# Altium PCB ControlBoard.PcbDoc
Units mil, origin at the board's own origin, x right, y up, seen from the top; angles counter-clockwise.
Board outline 6000 x 4000 mil, 2 copper layers (Top Layer, Bottom Layer); 74 components, 96 nets, 363 pads, 6 vias.
Unrouted connection lines stored in the file: 181.
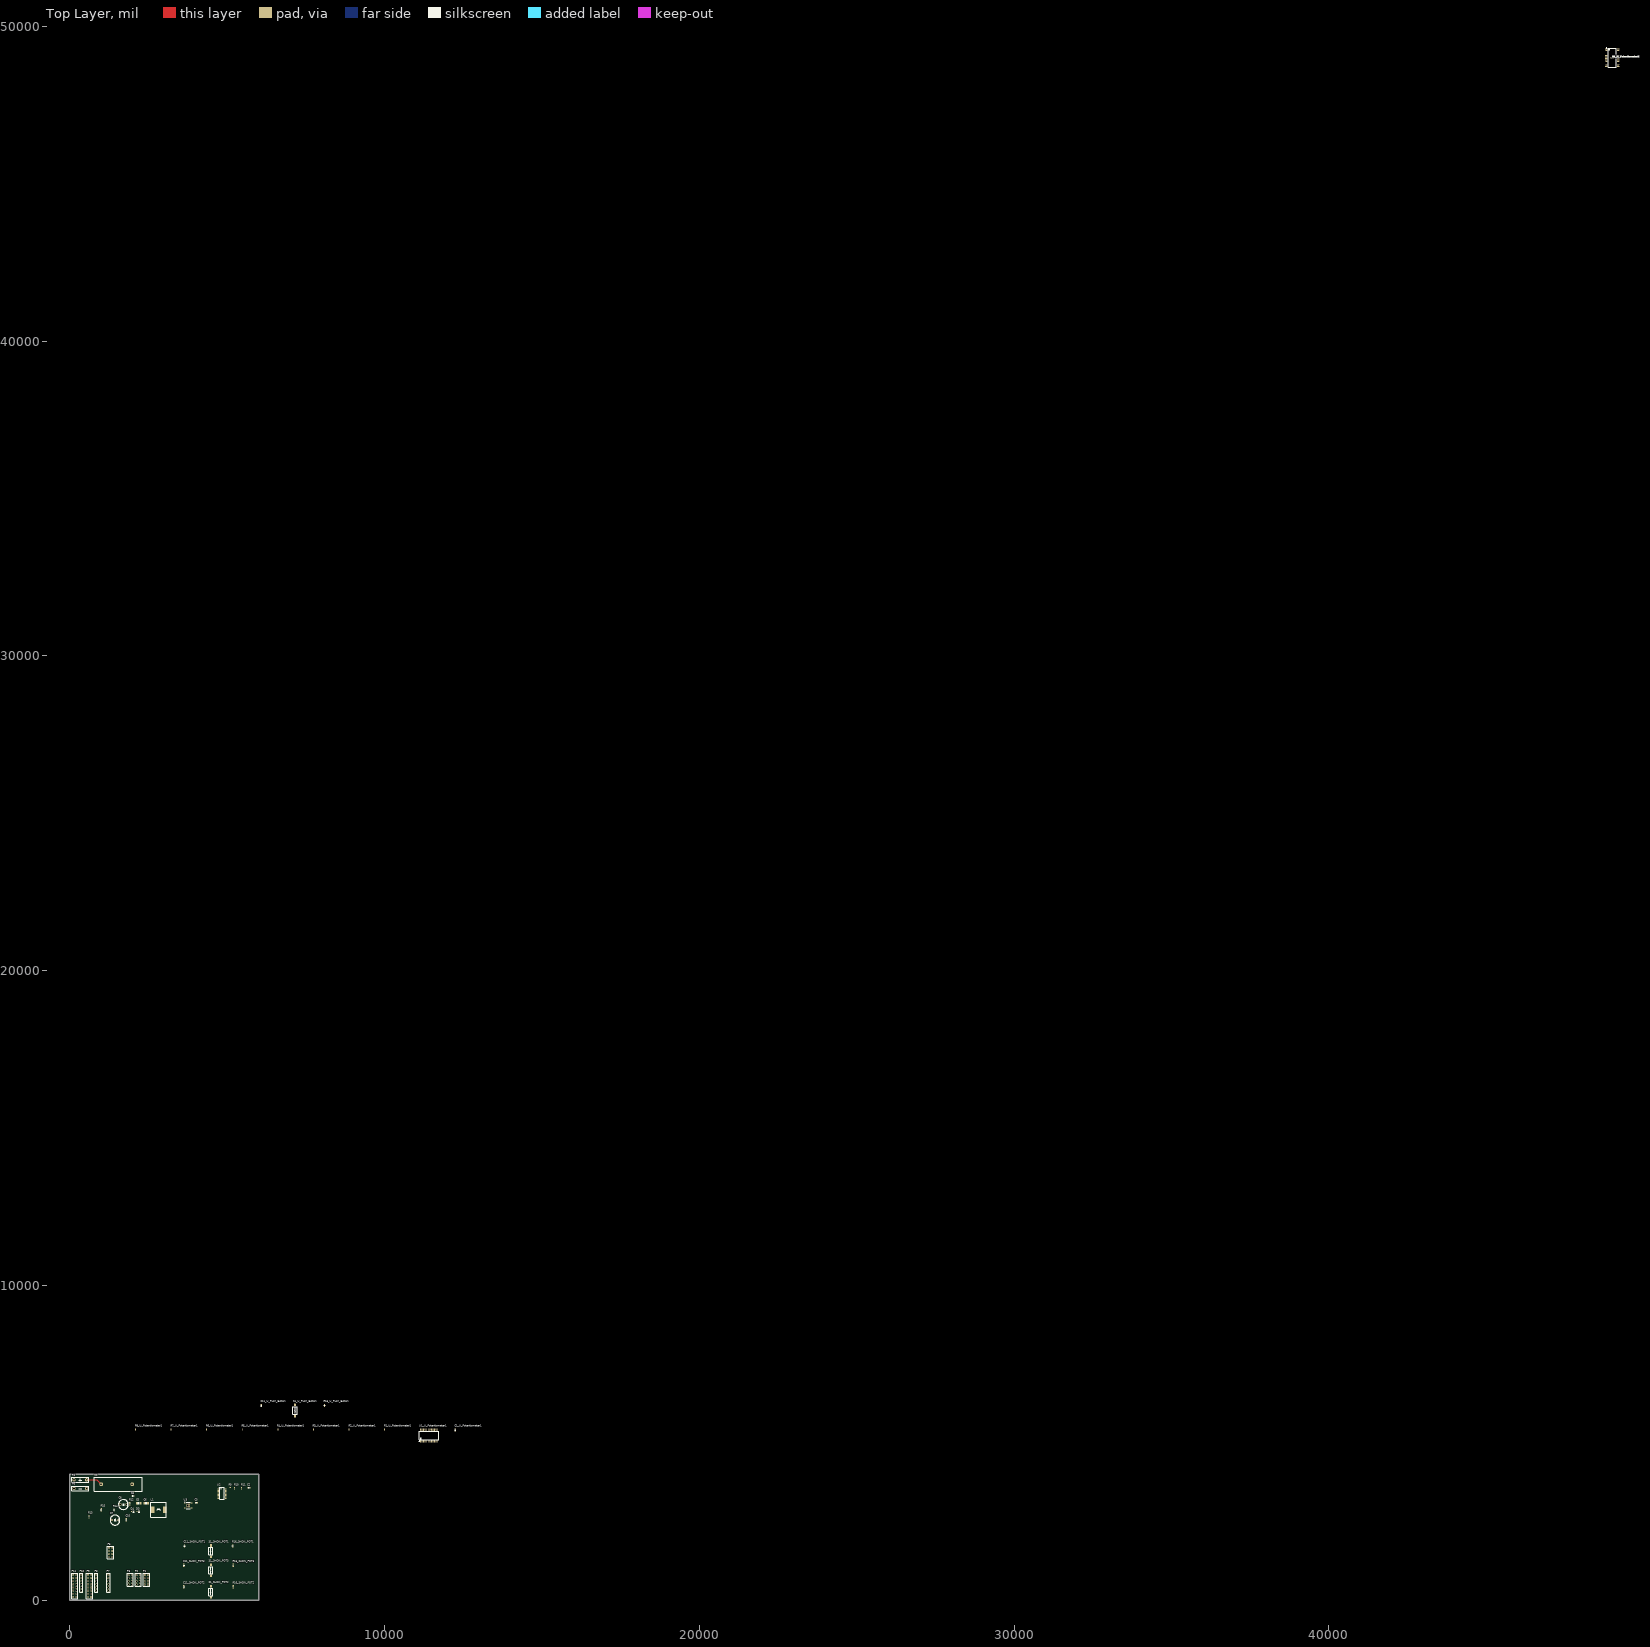
[diagram p0: Top Layer view]
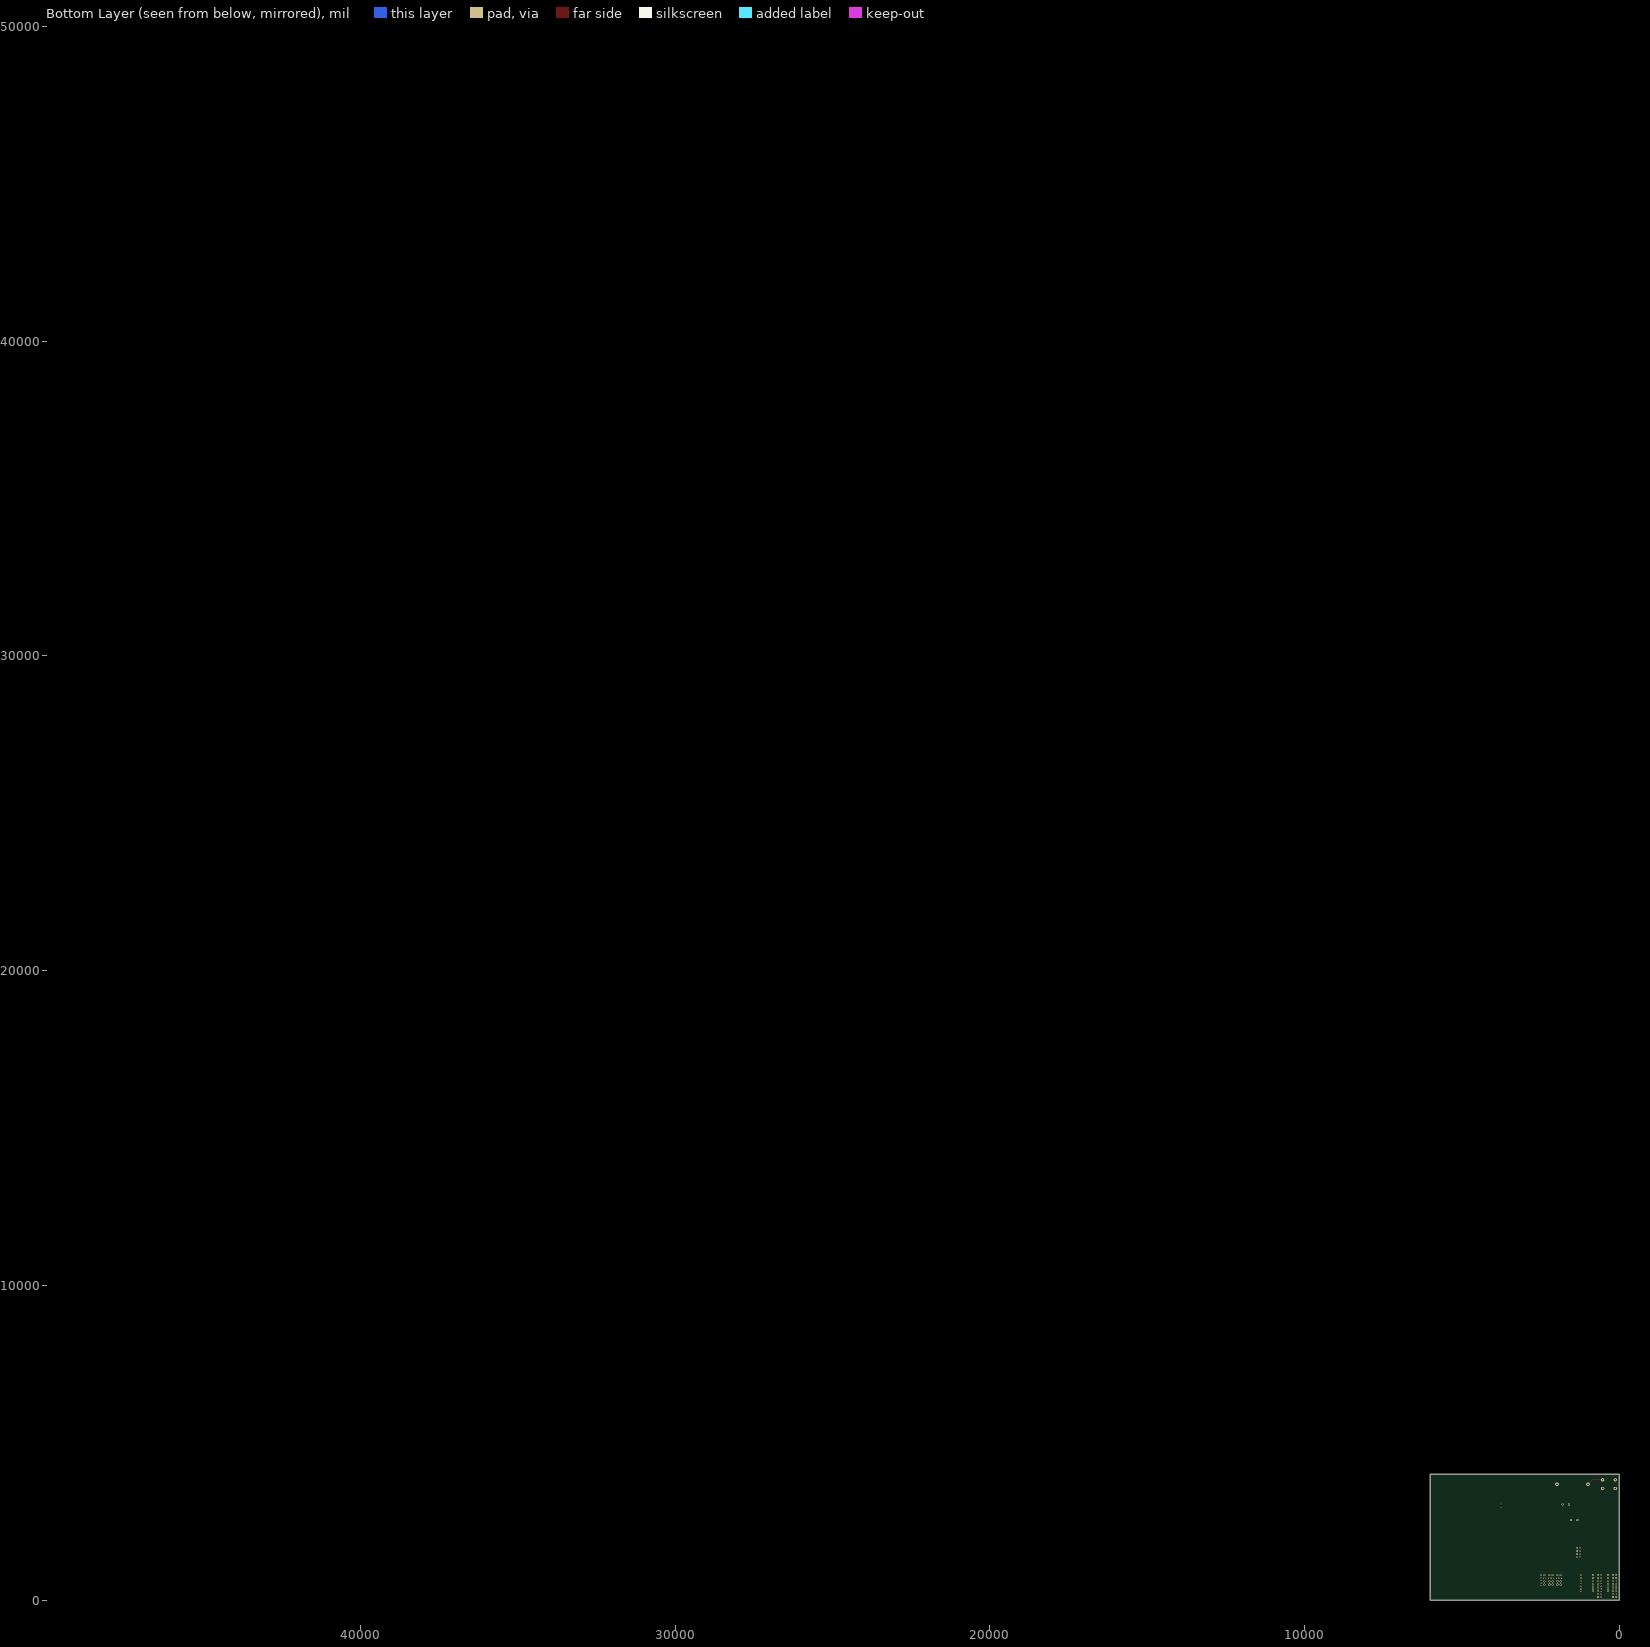
[diagram p1: Bottom Layer view, seen from below]

## Layer stack, top to bottom
Top Solder: solder mask 0.4, Solder Resist, Dk 3.5
Top Layer: signal copper 1.4
Dielectric 1: dielectric 12.6, FR-4, Dk 4.8
Bottom Layer: signal copper 1.4
Bottom Solder: solder mask 0.4, Solder Resist, Dk 3.5

## Board outline
0,0 6000,0 6000,4000 0,4000

## Design rules (kind name [scope] priority, off if disabled: settings)
Clearance [All] p1: gap=10
PolygonConnect [All] p1: connectstyle=Relief reliefconductorwidth=10 reliefentries=4 polygonreliefangle="90 Angle" airgapwidth=10
RoomDefinition U_Push_Button [InComponentClass('U_Push_Button')] p1: confinementstyle=ConfineIn formatcopy=TRUE lockcomponents=FALSE outline 6045,5795 9060,5795 9060,6365 6045,6365
RoomDefinition U_Potentiometer3 [InComponentClass('U_Potentiometer3')] p2: confinementstyle=ConfineIn formatcopy=TRUE lockcomponents=FALSE outline 48760,48675 50095,48675 50095,49325 48760,49325
RoomDefinition U_Potentiometer2 [InComponentClass('U_Potentiometer2')] p3: confinementstyle=ConfineIn formatcopy=TRUE lockcomponents=FALSE outline 48760,48675 50095,48675 50095,49325 48760,49325
RoomDefinition U_Potentiometer1 [InComponentClass('U_Potentiometer1')] p4: confinementstyle=ConfineIn formatcopy=TRUE lockcomponents=FALSE outline 2055,4989.69 13290,4989.69 13290,5579.69 2055,5579.69
RoomDefinition U_LED_Controller [InComponentClass('U_LED_Controller')] p5: confinementstyle=ConfineIn formatcopy=TRUE lockcomponents=FALSE outline 4670,3179.69 5760,3179.69 5760,3704.69 4670,3704.69
RoomDefinition U_DC-DC [InComponentClass('U_DC-DC')] p6: confinementstyle=ConfineIn formatcopy=TRUE lockcomponents=FALSE outline 8.46,2355 4378.46,2355 4378.46,3995 8.46,3995
RoomDefinition SHDN_POT3 [InComponentClass('SHDN_POT3')] p7: confinementstyle=ConfineIn formatcopy=TRUE lockcomponents=FALSE outline 3585,718.46 5940,718.46 5940,1288.46 3585,1288.46
RoomDefinition SHDN_POT2 [InComponentClass('SHDN_POT2')] p8: confinementstyle=ConfineIn formatcopy=TRUE lockcomponents=FALSE outline 3585,33.46 5940,33.46 5940,603.46 3585,603.46
RoomDefinition SHDN_POT1 [InComponentClass('SHDN_POT1')] p9: confinementstyle=ConfineIn formatcopy=TRUE lockcomponents=FALSE outline 3605,1325 5900,1325 5900,1895 3605,1895
RoomDefinition ControlBoard [InComponentClass('ControlBoard')] p10: confinementstyle=ConfineIn formatcopy=TRUE lockcomponents=FALSE outline 40,40 2540,40 2540,960 40,960
RoutingVias [All] p1: holewidth=28 width=50 viastyle="Through Hole" minholewidth=28 minwidth=50 maxholewidth=28 maxwidth=50
SolderMaskExpansion [All] p1: expansion=4
Width [All] p1: maxlimit=10 minlimit=8 preferedwidth=10 minimp=50.000000 maximp=50.000000 favimp=50.000000
30 further rules are at their usual default settings.

## Classes and differential pairs
channel class Push_Button: SHDN_POT1 SHDN_POT2 SHDN_POT3 U_Push_Button
channel class Potentiometer: U_Potentiometer1 U_Potentiometer2 U_Potentiometer3
net class S\H\D\N\_\P\O\T\[3..1]: S\H\D\N\_\P\O\T\1 S\H\D\N\_\P\O\T\2 S\H\D\N\_\P\O\T\3
net class POTB[11..0]: POTB0 POTB1 POTB2 POTB3 POTB4 POTB5 POTB6 POTB7 POTB8 POTB9 POTB10 POTB11
net class POTA[11..0]: POTA0 POTA1 POTA2 POTA3 POTA4 POTA5 POTA6 POTA7 POTA8 POTA9 POTA10 POTA11 POTA12 POTA13 POTA14 POTA15
net class LED[11..0]: LED0 LED1 LED2 LED3 LED4 LED5 LED6 LED7 LED8 LED9 LED10 LED11
component class U_Push_Button: C11_U_Push_Button R16_U_Push_Button S1_U_Push_Button
component class U_Potentiometer3: C1_U_Potentiometer3 R1_U_Potentiometer3 R2_U_Potentiometer3 R3_U_Potentiometer3 R4_U_Potentiometer3 R5_U_Potentiometer3 R6_U_Potentiometer3 R7_U_Potentiometer3 R8_U_Potentiometer3 U1_U_Potentiometer3
component class U_Potentiometer2: C1_U_Potentiometer2 R1_U_Potentiometer2 R2_U_Potentiometer2 R3_U_Potentiometer2 R4_U_Potentiometer2 R5_U_Potentiometer2 R6_U_Potentiometer2 R7_U_Potentiometer2 R8_U_Potentiometer2 U1_U_Potentiometer2
component class U_Potentiometer1: C1_U_Potentiometer1 R1_U_Potentiometer1 R2_U_Potentiometer1 R3_U_Potentiometer1 R4_U_Potentiometer1 R5_U_Potentiometer1 R6_U_Potentiometer1 R7_U_Potentiometer1 R8_U_Potentiometer1 U1_U_Potentiometer1
component class U_LED_Controller: C2 R9 R10 R11 U2
component class U_DC-DC: C3 C4 C5 C6 C7 C8 C9 C10 D1 D2 D3 D4 L1 R12 R13 R14 R15 U3
component class SHDN_POT3: C11_SHDN_POT3 R16_SHDN_POT3 S1_SHDN_POT3
component class SHDN_POT2: C11_SHDN_POT2 R16_SHDN_POT2 S1_SHDN_POT2
component class SHDN_POT1: C11_SHDN_POT1 R16_SHDN_POT1 S1_SHDN_POT1
component class ControlBoard: P1 P2 P3 P4 P5 P6 P7 P8 P9 P10 P11

## Components (designator, comment, footprint, x,y, rotation, side; value= is the part's Value field where it differs from the comment)
C1_U_Potentiometer1 "CS - CAPACITOR" CS-0603 12240,5399.69 r90 top (schematic designator C1)
C1_U_Potentiometer2 "CS - CAPACITOR" CS-0603 48999.5,48999.5 r0 top (schematic designator C1)
C1_U_Potentiometer3 "CS - CAPACITOR" CS-0603 48999.5,48999.5 r0 top (schematic designator C1)
C2 "CS - CAPACITOR" CS-0603 5690,3569.69 r0 top
C3 "CS - CAPACITOR" CS-0603 4018.46,3095 r0 top
C4 "CS - CAPACITOR" CS-0603 2000,3305 r0 top
C5 "CS - CAPACITOR" CS-1206 2188.46,3075 r0 top
C6 "CS - CAPACITOR" CS-1206 2423.46,3075 r0 top
C7 "CT - CAPACITOR ELECTROLYTIC" CT-CAP-ALUM-8X14 1335,2540 r0 top
C8 "CT - CAPACITOR ELECTROLYTIC" CT-CAP-ALUM-8X14 1600,3035 r0 top
C10 "CS - CAPACITOR" CS-0603 1788.46,2551.54 r90 top
C11_SHDN_POT1 "CS - CAPACITOR" CS-0603 3640,1715 r90 top (schematic designator C11)
C11_SHDN_POT2 "CS - CAPACITOR" CS-0603 3620,423.46 r90 top (schematic designator C11)
C11_SHDN_POT3 "CS - CAPACITOR" CS-0603 3620,1108.46 r90 top (schematic designator C11)
C11_U_Push_Button "CS - CAPACITOR" CS-0603 6080,6185 r90 top (schematic designator C11)
D3 "LED - NORMAL LED" "LED-0603 YELLOW" 2158.46,2815 r0 top
D4 "LED - NORMAL LED" "LED-0603 YELLOW" 1983.46,2815 r0 top
F1 "FT - Fuse" "FT - 5mm x 20mm" 995,3680 r0 top
L1 "LS - INDUCTOR" "LS-Inductor SMD" 2818.46,2870 r0 top
P1 "CON - HEADER 2X4" CON-HEADER-2X4 2480,495 r90 top
P2 "CON - HEADER 2X4" CON-HEADER-2X4 2220,495 r90 top
P3 "CON - HEADER 2X4" CON-HEADER-2X4 1965,495 r90 top
P4 "CON - BANANA" "CON-PCB BANANA RED" 530,3820 r180 top
P5 "CON - HEADER 2X4" CON-HEADER-2X4 1340,1360 r90 top
P6 "CON - BANANA" "CON-PCB BANANA BLACK" 530,3545 r180 top
P7 "CON - HEADER 1X6" CON-HEADER-1X6 1225,300 r90 top
P8 "CON - HEADER 1X6" CON-HEADER-1X6 840,300 r90 top
P9 "CON - HEADER 2X8" CON-HEADER-2X8 675,100 r90 top
P10 "CON - HEADER 1X6" CON-HEADER-1X6 360,300 r90 top
P11 "CON - HEADER 2X8" CON-HEADER-2X8 200,100 r90 top
R1_U_Potentiometer1 "RS - RESISTOR" RS-0402 9995,5419.69 r90 top (schematic designator R1)
R1_U_Potentiometer2 "RS - RESISTOR" RS-0402 48999.5,48999.5 r0 top (schematic designator R1)
R1_U_Potentiometer3 "RS - RESISTOR" RS-0402 48999.5,48999.5 r0 top (schematic designator R1)
R2_U_Potentiometer1 "RS - RESISTOR" RS-0402 8865,5419.69 r90 top (schematic designator R2)
R2_U_Potentiometer2 "RS - RESISTOR" RS-0402 48999.5,48999.5 r0 top (schematic designator R2)
R2_U_Potentiometer3 "RS - RESISTOR" RS-0402 48999.5,48999.5 r0 top (schematic designator R2)
R3_U_Potentiometer1 "RS - RESISTOR" RS-0402 7735,5419.69 r90 top (schematic designator R3)
R3_U_Potentiometer2 "RS - RESISTOR" RS-0402 48999.5,48999.5 r0 top (schematic designator R3)
R3_U_Potentiometer3 "RS - RESISTOR" RS-0402 48999.5,48999.5 r0 top (schematic designator R3)
R4_U_Potentiometer1 "RS - RESISTOR" RS-0402 6605,5419.69 r90 top (schematic designator R4)
R4_U_Potentiometer2 "RS - RESISTOR" RS-0402 48999.5,48999.5 r0 top (schematic designator R4)
R4_U_Potentiometer3 "RS - RESISTOR" RS-0402 48999.5,48999.5 r0 top (schematic designator R4)
R5_U_Potentiometer1 "RS - RESISTOR" RS-0402 5475,5419.69 r90 top (schematic designator R5)
R5_U_Potentiometer2 "RS - RESISTOR" RS-0402 48999.5,48999.5 r0 top (schematic designator R5)
R5_U_Potentiometer3 "RS - RESISTOR" RS-0402 48999.5,48999.5 r0 top (schematic designator R5)
R6_U_Potentiometer1 "RS - RESISTOR" RS-0402 4345,5419.69 r90 top (schematic designator R6)
R6_U_Potentiometer2 "RS - RESISTOR" RS-0402 48999.5,48999.5 r0 top (schematic designator R6)
R6_U_Potentiometer3 "RS - RESISTOR" RS-0402 48999.5,48999.5 r0 top (schematic designator R6)
R7_U_Potentiometer1 "RS - RESISTOR" RS-0402 3215,5419.69 r90 top (schematic designator R7)
R7_U_Potentiometer2 "RS - RESISTOR" RS-0402 48999.5,48999.5 r0 top (schematic designator R7)
R7_U_Potentiometer3 "RS - RESISTOR" RS-0402 48999.5,48999.5 r0 top (schematic designator R7)
R8_U_Potentiometer1 "RS - RESISTOR" RS-0402 2085,5419.69 r90 top (schematic designator R8)
R8_U_Potentiometer2 "RS - RESISTOR" RS-0402 48999.5,48999.5 r0 top (schematic designator R8)
R8_U_Potentiometer3 "RS - RESISTOR" RS-0402 48999.5,48999.5 r0 top (schematic designator R8)
R9 "RS - RESISTOR" RS-0402 5080,3574.69 r0 top
R10 "RS - RESISTOR" RS-0402 5230,3554.69 r90 top
R11 "RS - RESISTOR" RS-0402 5450,3554.69 r90 top
R12 "RS - RESISTOR" RS-0603 1903.46,3060 r90 top
R13 "RS - RESISTOR" RS-0603 603.46,2646.54 r90 top
R14 "RS - RESISTOR" RS-0603 1403.46,2861.54 r90 top
R15 "RS - RESISTOR" RS-0603 998.46,2866.54 r90 top
R16_SHDN_POT1 "RS - RESISTOR" RS-0603 5170,1715 r90 top (schematic designator R16)
R16_SHDN_POT2 "RS - RESISTOR" RS-0603 5190,423.46 r90 top (schematic designator R16)
R16_SHDN_POT3 "RS - RESISTOR" RS-0603 5190,1108.46 r90 top (schematic designator R16)
R16_U_Push_Button "RS - RESISTOR" RS-0603 8090,6185 r90 top (schematic designator R16)
S1_SHDN_POT1 "SW - Tactile Switch" SW-FSMSM 4475,1555 r90 top (schematic designator S1)
S1_SHDN_POT2 "SW - Tactile Switch" SW-FSMSM 4475,263.46 r90 top (schematic designator S1)
S1_SHDN_POT3 "SW - Tactile Switch" SW-FSMSM 4475,948.46 r90 top (schematic designator S1)
S1_U_Push_Button "SW - Tactile Switch" SW-FSMSM 7155,6025 r90 top (schematic designator S1)
U1_U_Potentiometer1 "IC - AD8403" IC-SOIC-24 11410,5229.69 r90 top (schematic designator U1)
U1_U_Potentiometer2 "IC - AD8403" IC-SOIC-24 48999.5,48999.5 r0 top (schematic designator U1)
U1_U_Potentiometer3 "IC - AD8403" IC-SOIC-24 48999.5,48999.5 r0 top (schematic designator U1)
U2 "IC - PCA9685" IC-TSSOP-28 4830,3389.69 r0 top
U3 "IC - TPS5430" IC-SOIC8-POWERPAD 3758.46,3005 r0 top

## Footprints (in the part's own frame and the unit in brackets; to place one, negate y for a bottom-side part, rotate by r counter-clockwise, add the part's x,y. Pads: shape width x height; smd on the part's side, far side on the other; paste and mask are expansions set on the pad)
CON-HEADER-1X6 [mm]
  rect 1.5x1.5 hole 0.9: 1(0,0)
  round 1.5 hole 0.9: 2(2.54,0) 3(5.08,0) 4(7.62,0) 5(10.16,0) 6(12.7,0)
  silkscreen extent -1.27,-1.27 13.97,1.27, body extent -1.27,-1.46 13.97,1.46, height 8.51
CON-HEADER-2X4 [mm]
  rect 1.5x1.5 hole 0.9: 1(0,0)
  round 1.5 hole 0.9: 2(2.54,0) 3(5.08,0) 4(7.62,0) 5(0,2.54) 6(2.54,2.54) 7(5.08,2.54) 8(7.62,2.54)
  silkscreen extent -1.27,-1.27 8.94,3.78, body extent -1.19,-1.27 8.97,3.81, height 9.27
CON-HEADER-2X8 [mm]
  rect 1.5x1.5 hole 0.9: 1(0,0)
  round 1.5 hole 0.9: 2(2.54,0) 3(5.08,0) 4(7.62,0) 5(10.16,0) 6(12.7,0) 7(15.24,0) 8(17.78,0) 9(17.78,2.54) 10(15.24,2.54) 11(12.7,2.54) 12(10.16,2.54) 13(7.62,2.54) 14(5.08,2.54) 15(2.54,2.54) 16(0,2.54)
  silkscreen extent -1.27,-1.27 18.97,3.78, body extent -1.22,-1.24 19.1,3.76, height 8.48
"CON-PCB BANANA BLACK" [mil] "BLACK"
  round 104 hole 52: 1(0,0) 2(400,0)
  silkscreen extent -65,-78 465,78, body extent -4,-78 408,78, height 203
"CON-PCB BANANA RED" [mil] "RED"
  round 104 hole 52: 1(0,0) 2(400,0)
  silkscreen extent -65,-78 465,78, body extent -4,-78 408,78, height 203
CS-0603 [mm]
  round 0.254 on Mech15: 0(0,0)
  rrect25% 0.9x1 smd: 1(-0.85,0) 2(0.85,0)
  Top Layer pour cut-out: -0.6,0.5 -0.4,0.7 0.4,0.7 0.6,0.5 0.6,-0.5 0.4,-0.7 -0.4,-0.7 -0.6,-0.5
  silkscreen extent -0.14,-0.53 0.12,0.51, body extent -0.8,-0.4 0.8,0.4, height 0.3
CS-1206 [mm]
  round 0.508 on Mech15: 0(0,0)
  rrect25% 1.3x1.8 smd: 1(-1.45,0) 2(1.45,0)
  silkscreen extent -0.31,-0.84 0.3,0.86, body extent -1.58,-0.8 1.62,0.8, height 1
CT-CAP-ALUM-8X14 [mm] "8mm Dia X 14mm hei, pitch 5mm"
  round 0.508 on Mech15: 0(2.5,0)
  rrect25% 1.7x1.7 hole 0.8: 1(0,0)
  round 1.7 hole 0.8: 2(5,0)
  silkscreen extent -1.5,-4 6.5,4, body extent -1.59,-4.1 6.61,4.1, height 2.4
"FT - 5mm x 20mm" [mm]
  round 3 hole 1.6: 1(0,0) 2(25,0)
  silkscreen extent -5.5,-5.5 33,5.5, body extent -0.51,-4.8 25.09,4.8, height 11.5
IC-SOIC8-POWERPAD [mm] "SOIC, 8-Leads, Body 4.90x3.90mm, Pitch 1.27mm, Thermal Pad 3.10x2.60mm, IPC Medium Density"
  rect 1.45x0.6 smd: 1(-2.725,1.905) 2(-2.725,0.635) 3(-2.725,-0.635) 4(-2.725,-1.905) 5(2.725,-1.905) 6(2.725,-0.635) 7(2.725,0.635) 8(2.725,1.905)
  rect 2.6x3.1 smd: 9(0,0)
  silkscreen extent -2.85,-2.5 1.6,2.88, body extent -3.02,-2.5 3.18,2.5, height 1.75
IC-SOIC-24 [mm] "SOIC, 24-Leads, Body 15,40x7,50mm, Pitch 1,27mm, IPC Medium Density"
  oval 1.9x0.6 smd: 1(-4.75,6.985) 2(-4.75,5.715) 3(-4.75,4.445) 4(-4.75,3.175) 5(-4.75,1.905) 6(-4.75,0.635) 7(-4.75,-0.635) 8(-4.75,-1.905) 9(-4.75,-3.175) 10(-4.75,-4.445) 11(-4.75,-5.715) 12(-4.75,-6.985) 13(4.75,-6.985) 14(4.75,-5.715) 15(4.75,-4.445) 16(4.75,-3.175) 17(4.75,-1.905) 18(4.75,-0.635) 19(4.75,0.635) 20(4.75,1.905) 21(4.75,3.175) 22(4.75,4.445) 23(4.75,5.715) 24(4.75,6.985)
  silkscreen extent -4.87,-7.8 3.4,7.96, body extent -5.12,-7.75 5.18,7.75, height 2.65
IC-TSSOP-28 [mm] "TSOP, 28-Leads, Body 9.70x4.40mm, Pitch 0.65mm, IPC Medium Density"
  oval 1.4x0.45 smd: 1(-2.95,4.225) 2(-2.95,3.575) 3(-2.95,2.925) 4(-2.95,2.275) 5(-2.95,1.625) 6(-2.95,0.975) 7(-2.95,0.325) 8(-2.95,-0.325) 9(-2.95,-0.975) 10(-2.95,-1.625) 11(-2.95,-2.275) 12(-2.95,-2.925) 13(-2.95,-3.575) 14(-2.95,-4.225) 15(2.95,-4.225) 16(2.95,-3.575) 17(2.95,-2.925) 18(2.95,-2.275) 19(2.95,-1.625) 20(2.95,-0.975) 21(2.95,-0.325) 22(2.95,0.325) 23(2.95,0.975) 24(2.95,1.625) 25(2.95,2.275) 26(2.95,2.925) 27(2.95,3.575) 28(2.95,4.225)
  silkscreen extent -3.07,-4.9 1.85,5.12, body extent -2.25,-4.9 2.25,4.9, height 1.1
"LED-0603 YELLOW" [mm]
  round 0.254 on Mech15: 0(0,0)
  rrect25% 0.8x0.8 smd: A(-0.85,0) K(0.85,0)
  Top Layer pour cut-out: -0.5,0.5 0.5,0.5 0.5,-0.5 -0.5,-0.5
  silkscreen extent 0.45,-0.67 1.35,0.67, body extent -0.83,-0.4 0.79,0.4, height 0.6
"LS-Inductor SMD" [mm] "MD Inductor 12.5mm x 12.5mm"
  rect 2.9x5.4 smd: 1(-4.85,0) 2(4.85,0)
  silkscreen extent -6.25,-6.25 6.25,6.25, body extent -6.32,-6.32 6.38,6.38, height 8.5
RS-0402 [mm]
  round 0.2 on Mech15: 0(0,0)
  rrect20% 0.6x0.6 smd: 1(-0.5,0) 2(0.5,0)
  Top Layer pour cut-out: -0.325,0.375 -0.2,0.5 0.2,0.5 0.325,0.375 0.325,-0.375 0.2,-0.5 -0.2,-0.5 -0.325,-0.375
  body extent -0.5,-0.25 0.5,0.25, height 0.35
RS-0603 [mm]
  round 0.254 on Mech15: 0(0,0)
  rrect25% 0.9x1 smd: 1(-0.85,0) 2(0.85,0)
  Top Layer pour cut-out: -0.6,0.5 -0.4,0.7 0.4,0.7 0.6,0.5 0.6,-0.5 0.4,-0.7 -0.4,-0.7 -0.6,-0.5
  silkscreen extent -0.15,-0.41 0.15,0.41, body extent -0.77,-0.43 0.78,0.42, height 0.45
SW-FSMSM [mm] "SWITCH TACTILE SPST-NO 0.05A 12V"
  rect 2.1x1.6 smd: 1(-4.55,0) 2(4.55,0)
  silkscreen extent -3,-1.75 3,1.75, body extent -5.17,-1.83 5.23,1.67

## Part data
C3: "CAP CER 10000PF 50V 10% X7R 0603"
L1: "INDUCTOR SHIELD PWR"
P1 P2 P3 P5: "100mil header 2 row 8pins"
P7 P8 P10: "100mil header 1 row 6 pins"
P9 P11: "100mil header 2 row 16pins"
U1_U_Potentiometer1 U1_U_Potentiometer2 U1_U_Potentiometer3: "DIGITAL POTENTIOMETER"
U2: "16-channel, 12-bit PWM Fm + I2C-bus LED controller"
U3: "IC REG BUCK ADJ 3A 8SOPWRPAD"

## Via types
v1: diameter 19.68, hole 7.87, Top Layer to Bottom Layer, 6 vias

## Nets (pads, with @x,y where several pads share a name; then routed paths per layer and width w, separated by ;. In a path a pad name is that pad's centre, name@x,y a point inside that pad or via, vN(x,y) a via of type N, cw(c..) or ccw(c..) an arc to the next point about the centre after c; other vN are vias at no path point)
5V0: C1_U_Potentiometer1.1 C1_U_Potentiometer2.1 C1_U_Potentiometer3.1 C2.1 C10.2 C11_U_Push_Button.1 L1.2 P7.5 P8.5 P10.5 R9.2 R10.2 R11.2 R13.1 R14.1 R16_SHDN_POT1.2 R16_SHDN_POT2.2 R16_SHDN_POT3.2 S1_U_Push_Button.2 U1_U_Potentiometer1.15 U1_U_Potentiometer1.16 U1_U_Potentiometer2.15 U1_U_Potentiometer2.16 U1_U_Potentiometer3.15 U1_U_Potentiometer3.16 U2.28
CS1: P1.4 P9.6 U1_U_Potentiometer2.11
CS2: P1.5 P9.7 U1_U_Potentiometer1.11
CS3: P1.6 P9.8 U1_U_Potentiometer3.11
GND: C1_U_Potentiometer1.2 C1_U_Potentiometer2.2 C1_U_Potentiometer3.2 C2.2 C4.1 C5.1 C6.1 C7.2 C8.2 C10.1 C11_SHDN_POT1.1 C11_SHDN_POT2.1 C11_SHDN_POT3.1 D3.K D4.K P6.1 P7.6 P8.6 P9.9 P10.6 R15.2 R16_U_Push_Button.2 S1_SHDN_POT1.2 S1_SHDN_POT2.2 S1_SHDN_POT3.2 U1_U_Potentiometer1.1 U1_U_Potentiometer1.5 U1_U_Potentiometer1.9 U1_U_Potentiometer1.17 U1_U_Potentiometer1.21 U1_U_Potentiometer2.1 U1_U_Potentiometer2.5 U1_U_Potentiometer2.9 U1_U_Potentiometer2.17 U1_U_Potentiometer2.21 U1_U_Potentiometer3.1 U1_U_Potentiometer3.5 U1_U_Potentiometer3.9 U1_U_Potentiometer3.17 U1_U_Potentiometer3.21 U2.1 U2.2 U2.3 U2.4 U2.5 U2.14 U2.24 U2.25 U3.6 U3.9
  other v1: 3736.81,2961.69 3780.12,2961.69 3736.81,3005 3780.12,3005 3736.81,3048.31 3780.12,3048.31
L\E\D\_\O\E\: C11_U_Push_Button.2 R9.1 R16_U_Push_Button.1 S1_U_Push_Button.1 U2.23
LED0: P7.1
LED1: P7.2
LED2: P7.3
LED3: P7.4
LED4: P8.1
LED5: P8.2
LED6: P8.3
LED7: P8.4
LED8: P10.1
LED9: P10.2
LED10: P10.3
LED11: P10.4
NetC3_1: C3.1 L1.1 U3.8
NetC3_2: C3.2 U3.1
NetC4_2: C4.2 C5.2 C6.2 C7.1 C8.1 R12.2 U3.7
NetD1_A: F1.2
NetD3_A: D3.A R12.1
NetD4_A: D4.A R13.2
NetF1_1: F1.1 P4.1 | length 525.9
  Top Layer w10: P4.1 855,3820 860,3820 995,3685 F1.1
NETLABEL67: P9.12
NETLABEL68: P9.13
NETLABEL69: P9.14
NETLABEL70: P9.15
NETLABEL71: P9.16
NetR1_U_Potentiometer1_2: R1_U_Potentiometer1.2 U1_U_Potentiometer1.22 U1_U_Potentiometer1.23
NetR1_U_Potentiometer2_2: R1_U_Potentiometer2.2 U1_U_Potentiometer2.22 U1_U_Potentiometer2.23
NetR1_U_Potentiometer3_2: R1_U_Potentiometer3.2 U1_U_Potentiometer3.22 U1_U_Potentiometer3.23
NetR2_U_Potentiometer1_2: R2_U_Potentiometer1.2 U1_U_Potentiometer1.24
NetR2_U_Potentiometer2_2: R2_U_Potentiometer2.2 U1_U_Potentiometer2.24
NetR2_U_Potentiometer3_2: R2_U_Potentiometer3.2 U1_U_Potentiometer3.24
NetR3_U_Potentiometer1_2: R3_U_Potentiometer1.2 U1_U_Potentiometer1.3 U1_U_Potentiometer1.4
NetR3_U_Potentiometer2_2: R3_U_Potentiometer2.2 U1_U_Potentiometer2.3 U1_U_Potentiometer2.4
NetR3_U_Potentiometer3_2: R3_U_Potentiometer3.2 U1_U_Potentiometer3.3 U1_U_Potentiometer3.4
NetR4_U_Potentiometer1_2: R4_U_Potentiometer1.2 U1_U_Potentiometer1.2
NetR4_U_Potentiometer2_2: R4_U_Potentiometer2.2 U1_U_Potentiometer2.2
NetR4_U_Potentiometer3_2: R4_U_Potentiometer3.2 U1_U_Potentiometer3.2
NetR5_U_Potentiometer1_2: R5_U_Potentiometer1.2 U1_U_Potentiometer1.18 U1_U_Potentiometer1.19
NetR5_U_Potentiometer2_2: R5_U_Potentiometer2.2 U1_U_Potentiometer2.18 U1_U_Potentiometer2.19
NetR5_U_Potentiometer3_2: R5_U_Potentiometer3.2 U1_U_Potentiometer3.18 U1_U_Potentiometer3.19
NetR6_U_Potentiometer1_2: R6_U_Potentiometer1.2 U1_U_Potentiometer1.20
NetR6_U_Potentiometer2_2: R6_U_Potentiometer2.2 U1_U_Potentiometer2.20
NetR6_U_Potentiometer3_2: R6_U_Potentiometer3.2 U1_U_Potentiometer3.20
NetR7_U_Potentiometer1_2: R7_U_Potentiometer1.2 U1_U_Potentiometer1.7 U1_U_Potentiometer1.8
NetR7_U_Potentiometer2_2: R7_U_Potentiometer2.2 U1_U_Potentiometer2.7 U1_U_Potentiometer2.8
NetR7_U_Potentiometer3_2: R7_U_Potentiometer3.2 U1_U_Potentiometer3.7 U1_U_Potentiometer3.8
NetR8_U_Potentiometer1_2: R8_U_Potentiometer1.2 U1_U_Potentiometer1.6
NetR8_U_Potentiometer2_2: R8_U_Potentiometer2.2 U1_U_Potentiometer2.6
NetR8_U_Potentiometer3_2: R8_U_Potentiometer3.2 U1_U_Potentiometer3.6
NetR14_2: R14.2 R15.1 U3.4
POTA0: P2.1 P11.1 R1_U_Potentiometer2.1
POTA1: P2.3 P11.2 R3_U_Potentiometer2.1
POTA2: P2.8 P11.3 R5_U_Potentiometer2.1
POTA3: P2.6 P11.4 R7_U_Potentiometer2.1
POTA4: P3.1 P11.5 R1_U_Potentiometer1.1
POTA5: P3.3 P11.6 R3_U_Potentiometer1.1
POTA6: P3.8 P11.7 R5_U_Potentiometer1.1
POTA7: P3.6 P11.8 R7_U_Potentiometer1.1
POTA8: P5.1 P11.9 R1_U_Potentiometer3.1
POTA9: P5.3 P11.10 R3_U_Potentiometer3.1
POTA10: P5.8 P11.11 R5_U_Potentiometer3.1
POTA11: P5.6 P11.12 R7_U_Potentiometer3.1
POTA12: P11.13
POTA13: P11.14
POTA14: P11.15
POTA15: P11.16
POTB0: P2.2 R2_U_Potentiometer2.1
POTB1: P2.4 R4_U_Potentiometer2.1
POTB2: P2.7 R6_U_Potentiometer2.1
POTB3: P2.5 R8_U_Potentiometer2.1
POTB4: P3.2 R2_U_Potentiometer1.1
POTB5: P3.4 R4_U_Potentiometer1.1
POTB6: P3.7 R6_U_Potentiometer1.1
POTB7: P3.5 R8_U_Potentiometer1.1
POTB8: P5.2 R2_U_Potentiometer3.1
POTB9: P5.4 R4_U_Potentiometer3.1
POTB10: P5.7 R6_U_Potentiometer3.1
POTB11: P5.5 R8_U_Potentiometer3.1
S\H\D\N\_\P\O\T\1: C11_SHDN_POT1.2 R16_SHDN_POT1.1 S1_SHDN_POT1.1
S\H\D\N\_\P\O\T\1\: U1_U_Potentiometer2.10
S\H\D\N\_\P\O\T\2: C11_SHDN_POT2.2 R16_SHDN_POT2.1 S1_SHDN_POT2.1
S\H\D\N\_\P\O\T\2\: U1_U_Potentiometer1.10
S\H\D\N\_\P\O\T\3: C11_SHDN_POT3.2 R16_SHDN_POT3.1 S1_SHDN_POT3.1
S\H\D\N\_\P\O\T\3\: U1_U_Potentiometer3.10
SCL: P1.8 P9.2 R10.1 U2.26
SCLK: P1.3 P9.5 U1_U_Potentiometer1.14 U1_U_Potentiometer2.14 U1_U_Potentiometer3.14
SDA: P1.7 P9.1 R11.1 U2.27
SDI: P1.1 P9.3 U1_U_Potentiometer1.12 U1_U_Potentiometer2.12 U1_U_Potentiometer3.12
SDO: P1.2 P9.4 U1_U_Potentiometer1.13 U1_U_Potentiometer2.13 U1_U_Potentiometer3.13
SGND: P9.10
VS: P9.11
pads on no net: C1_U_Potentiometer1.0 C1_U_Potentiometer2.0 C1_U_Potentiometer3.0 C2.0 C3.0 C4.0 C5.0 C6.0 C7.0 C8.0 C10.0 C11_SHDN_POT1.0 C11_SHDN_POT2.0 C11_SHDN_POT3.0 C11_U_Push_Button.0 D3.0 D4.0 P4.2 P6.2 R1_U_Potentiometer1.0 R1_U_Potentiometer2.0 R1_U_Potentiometer3.0 R2_U_Potentiometer1.0 R2_U_Potentiometer2.0 R2_U_Potentiometer3.0 R3_U_Potentiometer1.0 R3_U_Potentiometer2.0 R3_U_Potentiometer3.0 R4_U_Potentiometer1.0 R4_U_Potentiometer2.0 R4_U_Potentiometer3.0 R5_U_Potentiometer1.0 R5_U_Potentiometer2.0 R5_U_Potentiometer3.0 R6_U_Potentiometer1.0 R6_U_Potentiometer2.0 R6_U_Potentiometer3.0 R7_U_Potentiometer1.0 R7_U_Potentiometer2.0 R7_U_Potentiometer3.0 R8_U_Potentiometer1.0 R8_U_Potentiometer2.0 R8_U_Potentiometer3.0 R9.0 R10.0 R11.0 R12.0 R13.0 R14.0 R15.0 R16_SHDN_POT1.0 R16_SHDN_POT2.0 R16_SHDN_POT3.0 R16_U_Push_Button.0 U2.6 U2.7 U2.8 U2.9 U2.10 U2.11 U2.12 U2.13 U2.15 U2.16 U2.17 U2.18 U2.19 U2.20 U2.21 U2.22 U3.2 U3.3 U3.5